# Altium PCB FCPCB.PcbDoc
Units mil, origin at the board's own origin, x right, y up, seen from the top; angles counter-clockwise.
Board outline 750 x 2325 mil, 2 copper layers (Top Layer, Bottom Layer); 21 components, 28 nets, 102 pads, 8 vias.
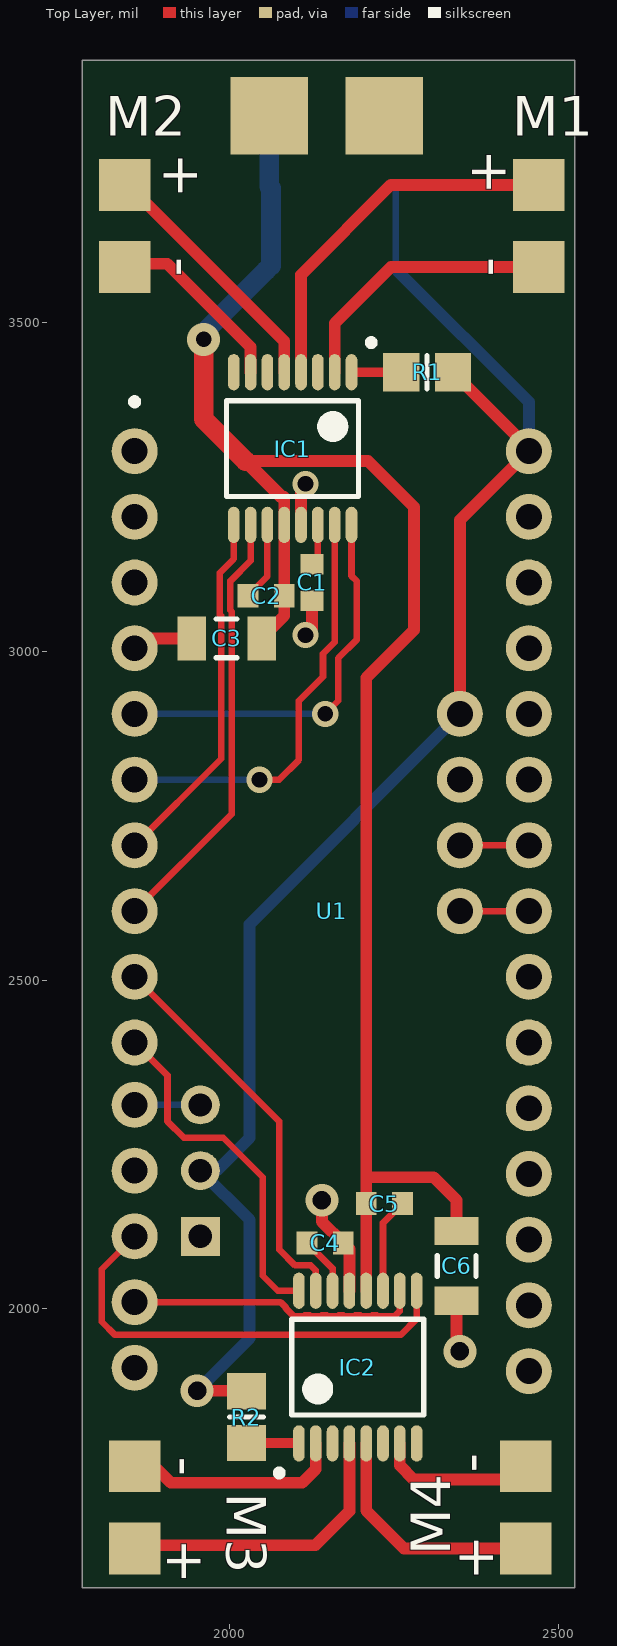
[diagram p0: Top Layer view]
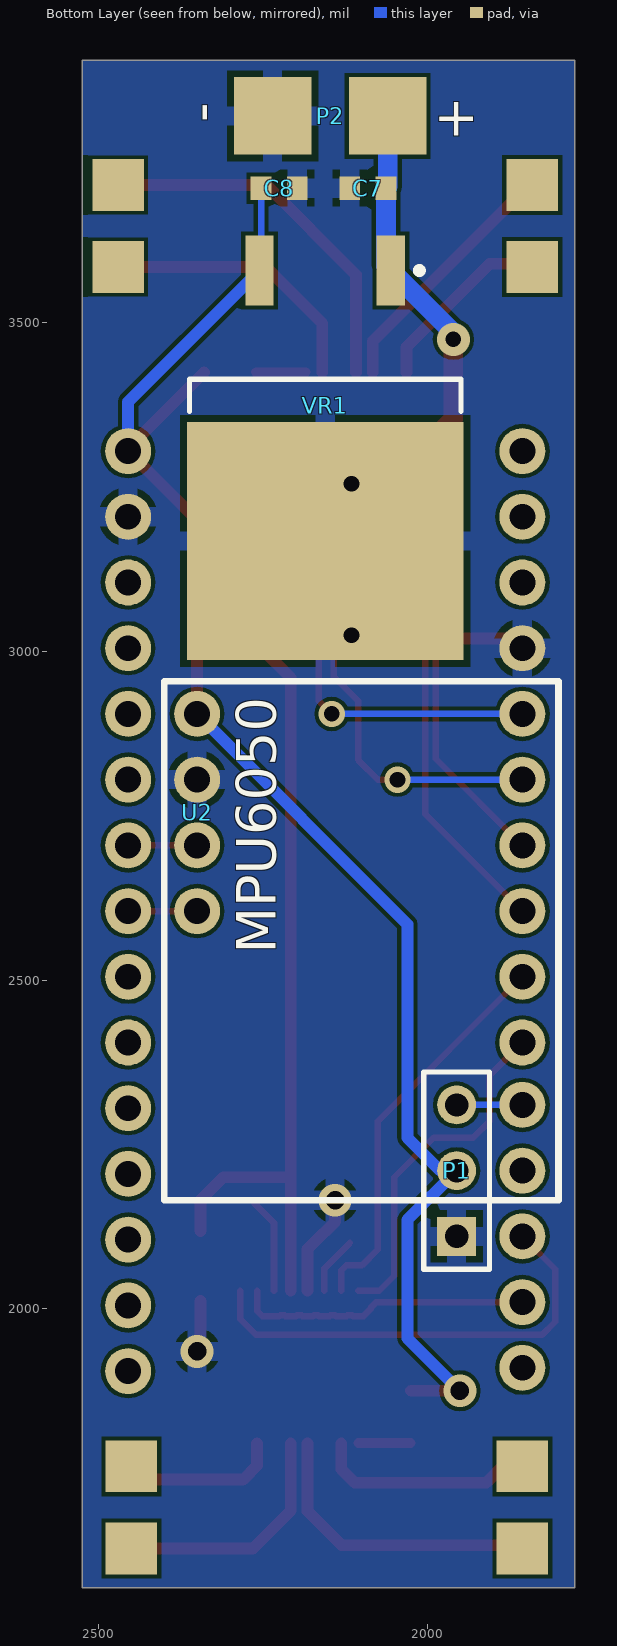
[diagram p1: Bottom Layer view, seen from below]

## Layer stack, top to bottom
Top Solder: solder mask 0.4, Solder Resist, Dk 3.5
Top Layer: signal copper 1.4
Dielectric 1: dielectric 12.6, FR-4, Dk 4.8
Bottom Layer: signal copper 1.4
Bottom Solder: solder mask 0.4, Solder Resist, Dk 3.5

## Board outline
1775,1575 2525,1575 2525,3900 1775,3900

## Design rules (kind name [scope] priority, off if disabled: settings)
Clearance [All] p1: gap=6
ComponentClearance [All] p1: gap=0 collisioncheckmode=3 verticalgap=0 showdistances=FALSE
HoleSize [All] p1: absolutevalues=TRUE maxlimit=100 minlimit=11.81 maxpercent=80.000 minpercent=20.000
PolygonConnect [All] p1: connectstyle=Relief reliefconductorwidth=30 reliefentries=4 polygonreliefangle="90 Angle" airgapwidth=10
RoutingVias [All] p1: holewidth=28 width=50 viastyle="Through Hole" minholewidth=23.62 minwidth=25 maxholewidth=28 maxwidth=50
SolderMaskExpansion [All] p1: expansion=4
Width [All] p1: maxlimit=30 minlimit=10 preferedwidth=10
28 further rules are at their usual default settings.

## Components (designator, comment, footprint, x,y, rotation, side; value= is the part's Value field where it differs from the comment)
C1 "Cap Semi" 1608[0603] 2125,3105 r270 top
C2 "Cap Semi" 1608[0603] 2055,3085 r180 top
C3 "Cap Semi" C1206 1995,3020 r0 top
C4 "Cap Semi" 1608[0603] 2145,2100 r0 top
C5 "Cap Semi" 1608[0603] 2235,2160 r0 top
C6 "Cap Semi" C1206 2345,2065 r90 top
C7 "Cap Semi" 1608[0603] 2090,3705 r180 bottom
C8 "Cap Semi" 1608[0603] 2225,3705 r0 bottom
IC1 "DVR8833" "DRV8833 TSOP" 2185,3425 r270 top
IC2 "DVR8833" "DRV8833 TSOP" 2105,1795 r90 top
M1 "MotorConector" MotorConector 2470,3585 r0 top
M2 "MotorConector" MotorConector 1840,3585 r0 top
M3 "MotorConector" MotorConector 1855,1760 r180 top
M4 "MotorConector" MotorConector 2450,1760 r180 top
P1 "Reciver" HDR1X3 1955,2110 r90 bottom
P2 "BatConector" BatConector 2235,3815 r270 bottom
R1 "Res3" 6-0805_M 2300,3425 r0 top
R2 "Res3" 6-0805_M 2025,1835 r90 top
U1 "ARDUINO NANO" "Arduino Nano" 1855,3305 r0 top
U2 "MPU6050B" MPU6050B 2350,2905 r180 bottom
VR1 "78M05" D2PAK_M 2155,3310 r270 bottom

## Footprints (in the part's own frame and the unit in brackets; to place one, negate y for a bottom-side part, rotate by r counter-clockwise, add the part's x,y. Pads: shape width x height; smd on the part's side, far side on the other; paste and mask are expansions set on the pad)
6-0805_M [mm] "Chip Resistor, Body 2.0x1.2mm, IPC Low Density"
  rect 1.4x1.5 smd: 1(-1,0) 2(1,0)
  silkscreen extent 0,-0.65 0,0.65, body extent -1.07,-0.7 1.07,0.7, height 0.7
1608[0603] [mm] "Chip Capacitor, Body 1.6x0.8mm, IPC High Density"
  rect 0.8x0.9 smd: 1(-0.7,0) 2(0.7,0)
  body extent -0.87,-0.48 0.87,0.48, height 1.3
"Arduino Nano" [mil]
  round 70 hole 39.37 unplated: 1(0,0) 2(0,-100) 3(0,-200) 4(0,-300) 5(0,-400) 6(0,-500) 7(0,-600) 8(0,-700) 9(0,-800) 10(0,-900) 11(0,-995) 12(0,-1095) 13(0,-1195) 14(0,-1295) 15(0,-1395) 16(600,-1400) 17(600,-1300) 18(600,-1200) 19(600,-1100) 20(600,-1000) 21(600,-900) 22(600,-800) 23(600,-700) 24(600,-600) 25(600,-500) 26(600,-400) 27(600,-300) 28(600,-200) 29(600,-100) 30(600,0)
  silkscreen extent -5,70 5,80
BatConector [mm] "3mm"
  rect 3x3 all layers, no hole: 0(0,0) 1(0,4.445)
C1206 [mm] "Chip Capacitor, Body 3.2x1.6mm, IPC High Density"
  rect 1.1x1.7 smd: 1(-1.35,0) 2(1.35,0)
  silkscreen extent -0.4,-0.75 0.4,0.75, body extent -1.7,-0.9 1.7,0.9, height 1.3
D2PAK_M [mm] "D2-PAK, 4-Leads, Body 8.8x10.4mm, Pitch 2.54mm, Lead Span 15.1mm, IPC Low Density"
  rect 2.7x1.1 smd: 1(-6.85,2.54) 3(-6.85,-2.54)
  rect 9.2x10.7 smd: 2(3.6,0)
  silkscreen extent -6.97,-5.25 -1.4,5.25, body extent -2.65,-5.28 6.35,5.28, height 4.69
"DRV8833 TSOP" [mm] "Dual H-Bridge Motor Driver"
  oval 1.4x0.45 smd: 1(0,0) 2(0,-0.65) 3(0,-1.3) 4(0,-1.95) 5(0,-2.6) 6(0,-3.25) 7(0,-3.9) 8(0,-4.55) 9(5.9,-4.55) 10(5.9,-3.9) 11(5.9,-3.25) 12(5.9,-2.6) 13(5.9,-1.95) 14(5.9,-1.3) 15(5.9,-0.65) 16(5.9,0)
  silkscreen extent -1.27,-4.82 4.8,0.89, body extent 0.45,-4.82 4.95,0.28, height 1.2
HDR1X3 [mm] "Connector; Header; 3 Position"
  rect 1.5x1.5 hole 0.9: 1(0,0)
  round 1.5 hole 0.9: 2(2.54,0) 3(5.08,0)
  silkscreen extent -1.27,-1.27 6.35,1.27
MotorConector [mm] "2mm"
  rect 2x2 all layers, no hole: 0(0,0) 1(0,3.175)
MPU6050B [mil] "MPU6050 Breakout"
  round 70 hole 39.37 unplated: 1(0,0) 2(0,-100) 3(0,-200) 4(0,-300)
  silkscreen extent -50,-740 550,50

## Part data
C1 C2 C3 C4 C5 C6 C7 C8: "Capacitor (Semiconductor SIM Model)"
IC1 IC2: "DRV8833"
P1: library part "Header 3", "Header, 3-Pin"
R1 R2: "Resistor"
U1: "Arduino Nano"
U2: "MPU6050 Breakout"
VR1: library part "Volt Reg", "Voltage Regulator"

## Via types
v1: diameter 40, hole 23.62, Top Layer to Bottom Layer, 4 vias
v2: diameter 50, hole 28, Top Layer to Bottom Layer, 3 vias
v3: diameter 50, hole 23.62, Top Layer to Bottom Layer, 1 vias

## Nets (pads, with @x,y where several pads share a name; then routed paths per layer and width w, separated by ;. In a path a pad name is that pad's centre, name@x,y a point inside that pad or via, vN(x,y) a via of type N, cw(c..) or ccw(c..) an arc to the next point about the centre after c; other vN are vias at no path point)
GND: C1.2 C3.1 C4.2 C6.1 C7.1 C8.1 IC1.13 IC2.13 P1.1 P2.0 U1.4 U1.29 U2.2 VR1.2 | length 448.7
  Top Layer w10: v2@2345,1940 v2(2350,1935)
  Top Layer w18: U1.4 1870,3020 C3.1 ; IC1.13 2108.23,3248.23 v1(2115,3255) ; v1(2115,3025) 2125,3035 C1.2 ; v2(2140,2165) 2140,2132.56 C4.2 2181.77,2090.79 IC2.13 ; v2@2345,1940 C6.1
"IMU SDA": U1.23 U2.4 | length 105
  Top Layer w10: U2.4 U1.23
"IMU SDL": U1.24 U2.3 | length 105
  Top Layer w10: U2.3 U1.24
M1D: IC1.16 U1.5 | length 601.1
  Top Layer w10: v1(2145,2905) 2165,2925 2165,2990 2193.19,3018.19 2193.19,3106.86 2185,3115.05 IC1.16
  Bottom Layer w10: U1.5 v1(2145,2905)
M1PWM: IC1.15 U1.6 | length 642.7
  Top Layer w10: v1(2045,2805) 2075,2805 2105,2835 2105,2925 2141.69,2961.69 2141.69,2996.69 2159.41,3014.41 IC1.15
  Bottom Layer w10: U1.6 v1(2045,2805)
M2D: IC1.9 U1.7 | length 551.9
  Top Layer w10: U1.7 1986.69,2836.69 1986.69,3054.1 1984.69,3056.1 1984.69,3119.69 2005.87,3140.87 IC1.9
M2PWM: IC1.10 U1.8 | length 662.5
  Top Layer w10: U1.8 2002.69,2752.69 2002.69,3060.73 2000.69,3062.73 2000.69,3107.27 2031.46,3138.04 IC1.10
M3D: IC2.16 U1.10 | length 535.3
  Top Layer w10: U1.10 1905,2355 1905,2285 1930,2260 1990,2260 2050,2200 2050,2050 2072.72,2027.28 IC2.16
M3PWM: IC2.15 U1.9 | length 605.8
  Top Layer w10: U1.9 2075,2285 2075,2090 2099.16,2065.84 2122.86,2065.84 2130.59,2058.11 IC2.15
M4D: IC2.10 U1.14 | length 451.4
  Top Layer w10: U1.14 2076.91,2010 2085.14,2001.77 2085.14,2000.36 2096.77,1988.72 2113.23,1988.72 2114.23,1989.72 2121.36,1989.72 2122.36,1988.72 2138.82,1988.72 2139.82,1989.72 2146.96,1989.72 2147.96,1988.72 2164.41,1988.72 2165.41,1989.72 2172.55,1989.72 2173.55,1988.72 2190,1988.72 2191,1989.72 2198.14,1989.72 2199.14,1988.72 2215.59,1988.72 2216.59,1989.72 2223.73,1989.72 2224.73,1988.72 2250.81,1988.72 2258.54,1996.46 IC2.10
M4PWM: IC2.9 U1.13 | length 691.3
  Top Layer w10: U1.13 1805,2060 1805,1980 1825,1960 2260,1960 2284.13,1984.13 IC2.9
NetC1_1: C1.1 IC1.14 | length 63.8
  Top Layer w10: C1.1 2133.82,3141.38 IC1.14
NetC2_2: C2.2 IC1.11 | length 120
  Top Layer w10: C2.2 2057.05,3114.61 IC1.11
NetC4_1: C4.1 IC2.14 | length 88.8
  Top Layer w10: C4.1 2156.18,2061.26 IC2.14
NetC5_2: C5.2 IC2.11 | length 145
  Top Layer w10: IC2.11 2232.95,2130.39 C5.2
NetIC1_1: IC1.1 R1.1 | length 75.6
  Top Layer w15: IC1.1 R1.1
NetIC2_1: IC2.1 R2.1 | length 80.3
  Top Layer w10: IC2.1@2104.37,1795.63 IC2.1
  Top Layer w15: R2.1 IC2.1@2104.37,1795.63
NM1: IC1.2 M1.0 | length 420.5
  Top Layer w18: IC1.2 2159.41,3499.41 2245,3585 M1.0
NM2: IC1.7 M2.0 | length 282.2
  Top Layer w10: 2029.72,3465.03 2031.46,3463.3
  Top Layer w18: M2.0@1840,3590 1904.76,3590 2029.72,3465.03 ; IC1.7 2031.46,3463.3
NM3: IC2.2 M3.0 | length 333.9
  Top Layer w15: M3.0 M3.0@1885,1760
  Top Layer w18: M3.0@1885,1760 1910,1735 2110,1735 2130.59,1755.59 IC2.2
NM4: IC2.7 M4.0 | length 227.2
  Top Layer w18: IC2.7 2258.54,1761.46 2280,1740 2415,1740 M4.0@2435,1760
PM1: IC1.4 M1.1 | length 566.7
  Top Layer w18: IC1.4 2108.23,3573.23 2245,3710 M1.1
PM2: IC1.5 M2.1 | length 390.5
  Top Layer w18: M2.1@1840,3715 2082.64,3472.36 IC1.5
PM3: IC2.4 M3.1 | length 451.4
  Top Layer w10: 2180,1690 2181.77,1691.77
  Top Layer w18: M3.1@1855,1640 2130,1640 2180,1690 ; 2181.77,1691.77 IC2.4
PM4: IC2.5 M4.1 | length 353.9
  Top Layer w18: IC2.5 2207.36,1692.64 2265,1635 M4.1@2435,1635
RX: P1.3 U1.11 | length 100
  Bottom Layer w10: U1.11 P1.3
VBAT: C2.1 C3.2 C5.1 C6.2 C7.2 IC1.12 IC2.12 P2.1 VR1.1 | length 2612.9
  Top Layer w10: 2078.65,3235 2082.64,3235 ; C2.1 C2.1@2082.64,3085.08 ; C5.1@2207.36,2159.92 C5.1
  Top Layer w18: 2023.65,3290 2210,3290 2280,3220 2280,3032.68 2207.44,2960.12 2207.44,2200 ; C3.2 2082.56,3054.41 C2.1 ; C2.1@2082.64,3085.08 IC1.12 2082.64,3235 ; IC2.12 C5.1@2207.36,2159.92 ; C5.1 2207.44,2200 ; C6.2 2345,2165 2310,2200 2207.44,2200
  Top Layer w20: 2023.65,3290 2078.65,3235
  Top Layer w30: v3(1960,3475) 1960,3353.65 2023.65,3290
  Bottom Layer w10: v3(1960,3475) v3@1960,3484.68 ; VR1.1 VR1.1@2062.44,3587.13 ; C7.2@2060,3707.44 C7.2
  Bottom Layer w30: v3@1960,3484.68 VR1.1 ; C7.2@2060,3707.44 P2.1 ; VR1.1@2062.44,3587.13 C7.2
VCC: C8.2 P1.2 R1.2 R2.2 U1.30 U2.1 VR1.3 | length 2443
  Top Layer w10: R2.2@2024.37,1875 R2.2 ; U1.30 U1.30@2455,3309.37
  Top Layer w18: v2(1950,1875) R2.2@2024.37,1875 ; R1.2 U1.30@2455,3309.37 ; U2.1 2350,3200 U1.30
  Bottom Layer w10: P1.2 P1.2@1980,2210 ; C8.2 2252.56,3582.13 VR1.3
  Bottom Layer w18: v2(1950,1875) 2030,1955 2030,2135 P1.2 ; P1.2@1980,2210 2030,2260 2030,2585 U2.1 ; VR1.3 2455,3379.68 U1.30
pads on no net: IC1.3 IC1.6 IC1.8 IC2.3 IC2.6 IC2.8 U1.1 U1.2 U1.3 U1.12 U1.15 U1.16 U1.17 U1.18 U1.19 U1.20 U1.21 U1.22 U1.25 U1.26 U1.27 U1.28

## Polygon pours and split planes (outlines as drawn)
GND on Bottom Layer "Bottom Layer-No Net" (solid, remove dead copper, pour order 0): 1775,3900 2525,3900 2525,1575 1775,1575

## Silkscreen, mask and mechanical layers (free items; w line width, h text height)
Mechanical 1:
  the board outline again, w10

## Text inside footprints (layer, text, board x,y; h text height)
M1: Top Overlay "+" at 2420,3695 h60 r90; Top Overlay "-" at 2420,3570 h60 r90
M2: Top Overlay "+" at 1950,3690 h60 r90; Top Overlay "-" at 1945,3570 h60 r90
M3: Top Overlay "+" at 1905,1650 h60 r270; Top Overlay "-" at 1905,1775 h60 r270
M4: Top Overlay "+" at 2350,1655 h60 r270; Top Overlay "-" at 2350,1780 h60 r270
P2: Bottom Overlay "-" at 2360,3835 h60 r90; Bottom Overlay "+" at 1990,3785 h60
U2: Bottom Overlay "MPU6050" at 2230,2540 h60 r270